# Altium PCB LED.PcbDoc
Units mm, origin at the board's own origin, x right, y up, seen from the top; angles counter-clockwise.
Board outline 40 x 40 mm, 2 copper layers (Top Layer, Bottom Layer), stack 1.671 mm thick; 5 components, 4 nets, 10 pads, 1 vias.
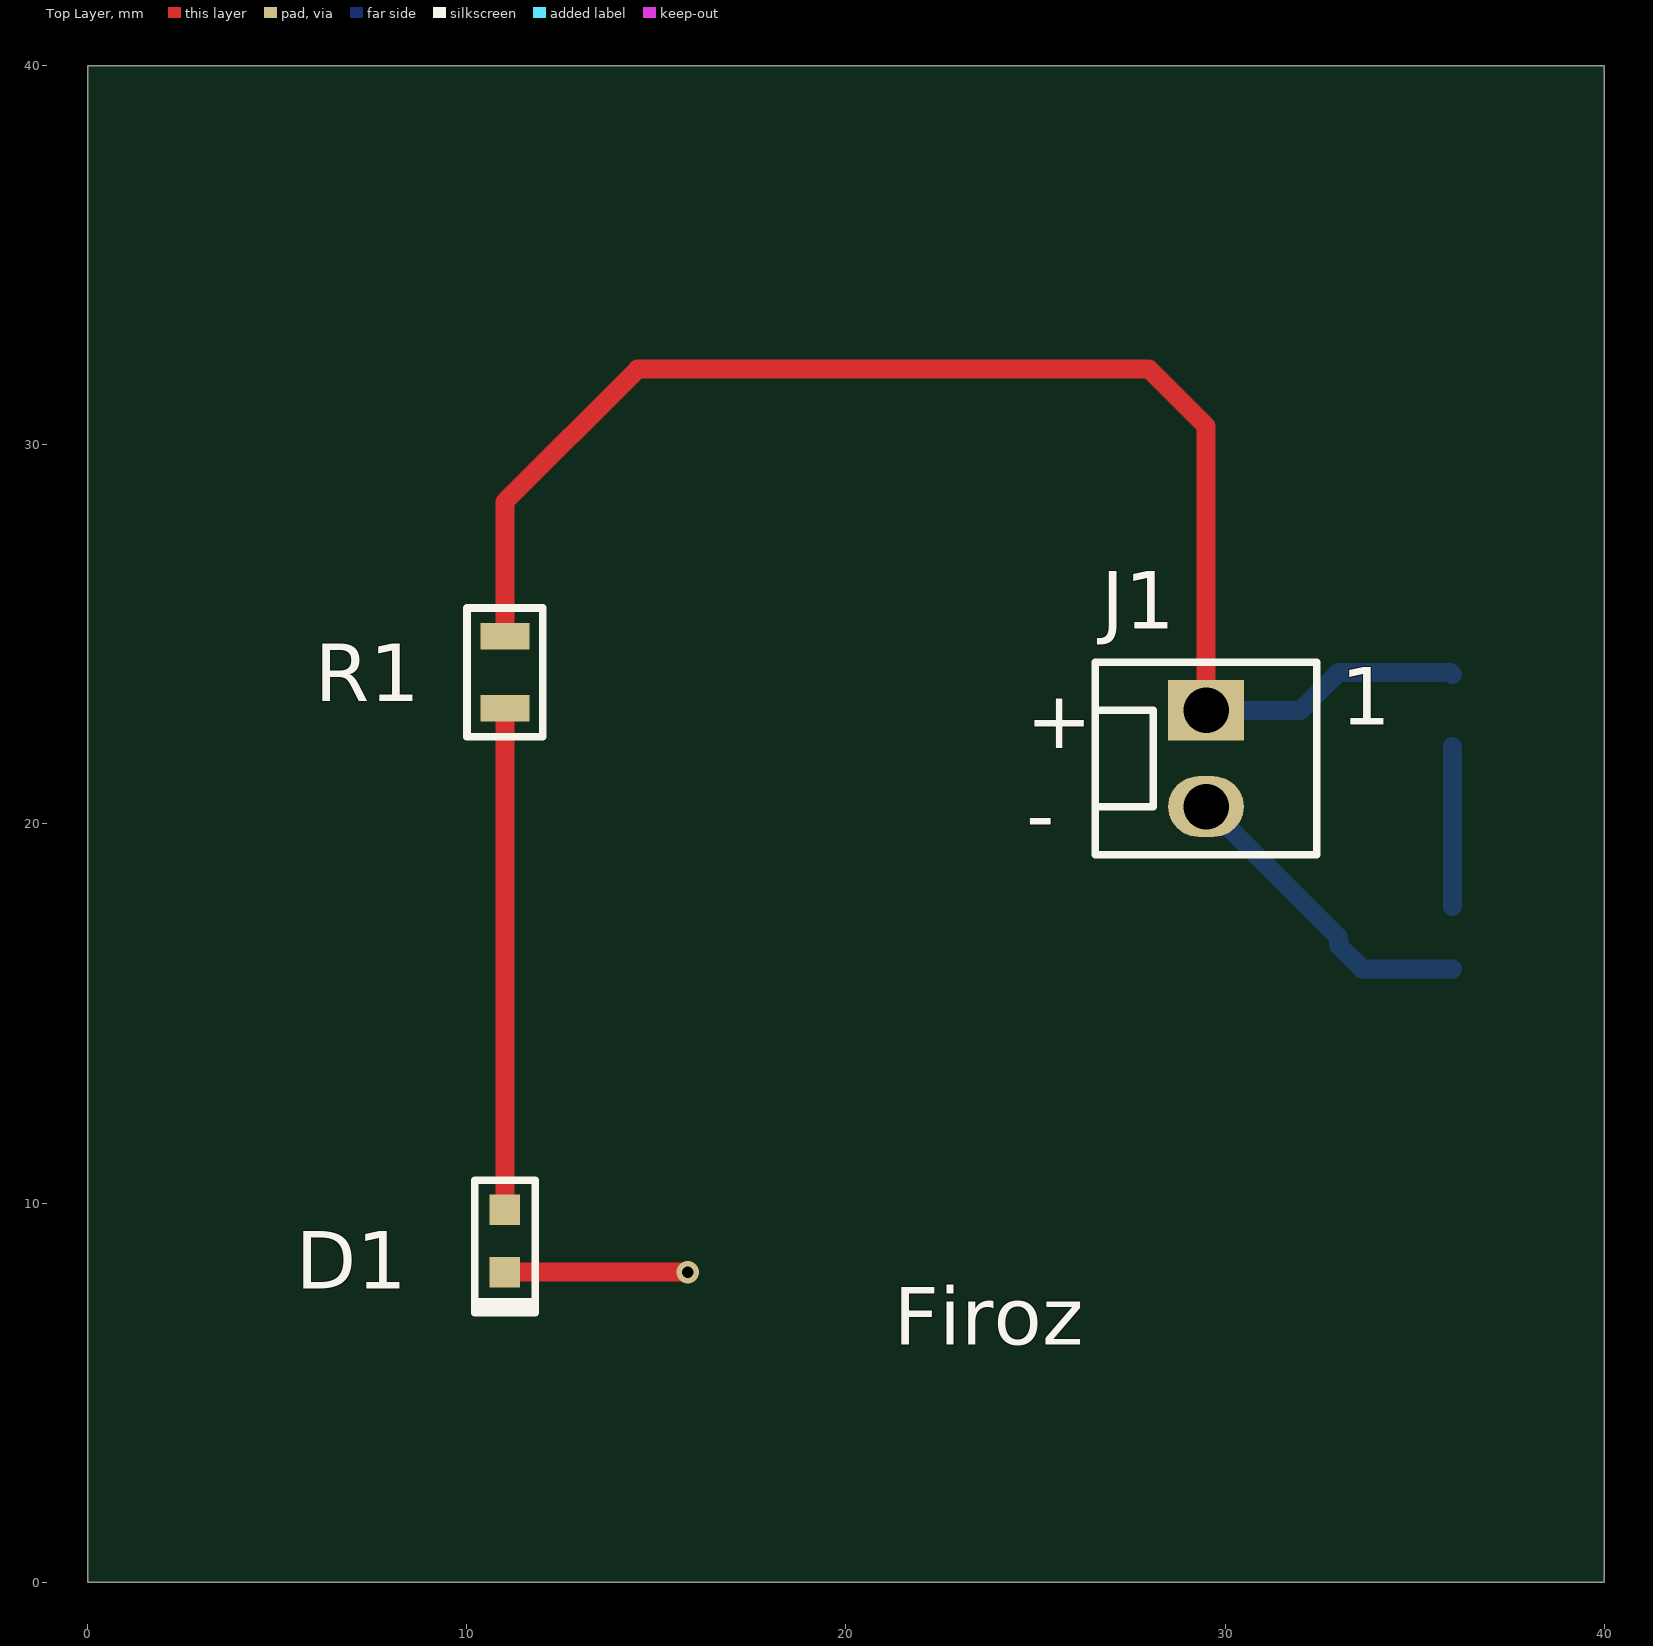
[diagram p0: Top Layer view]
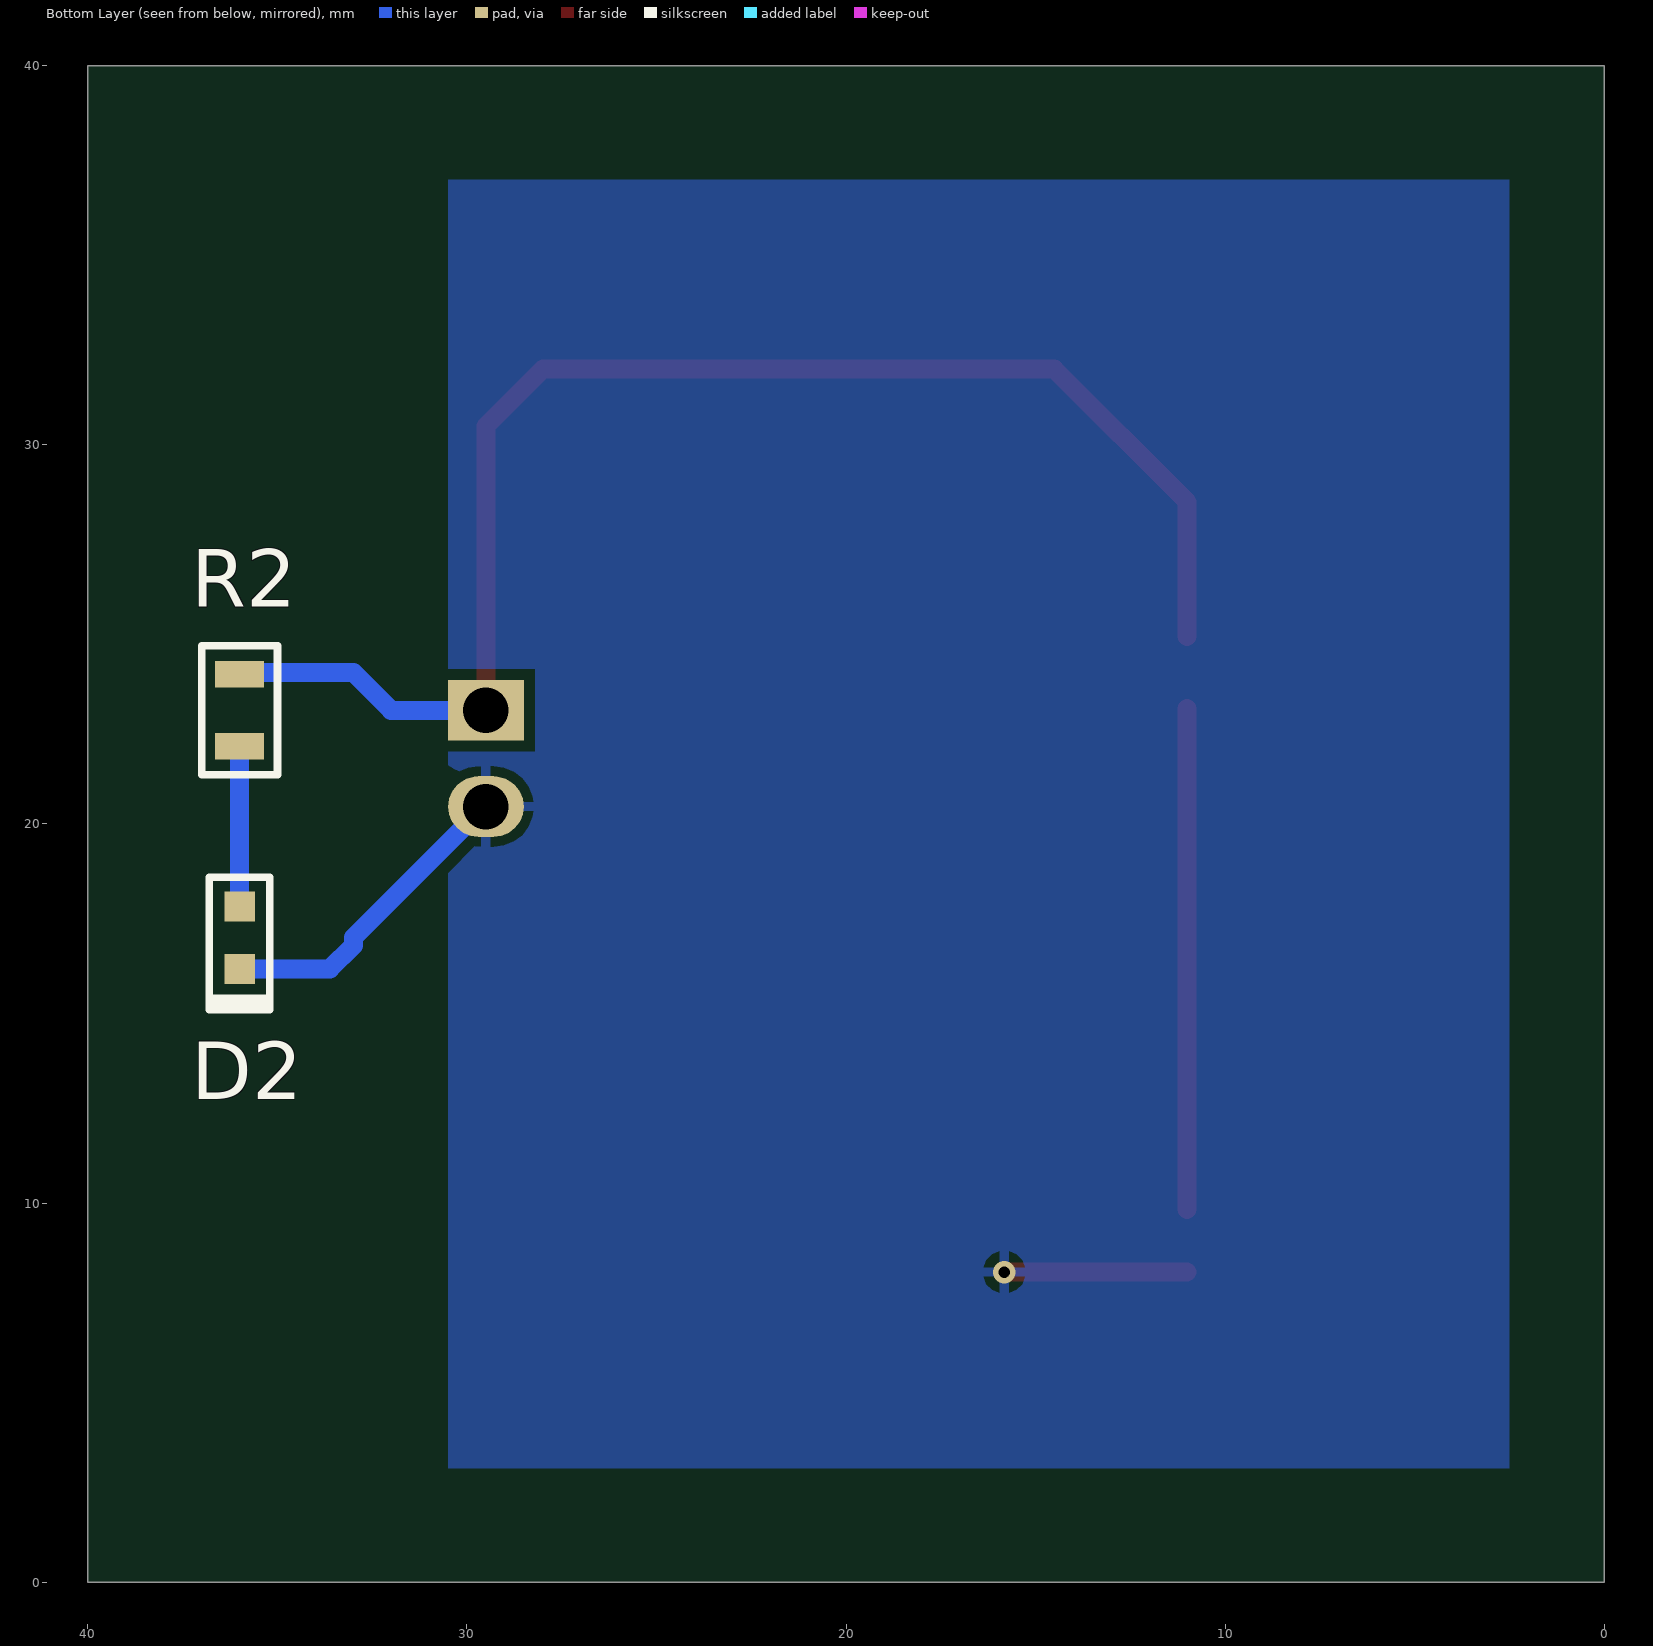
[diagram p1: Bottom Layer view, seen from below]
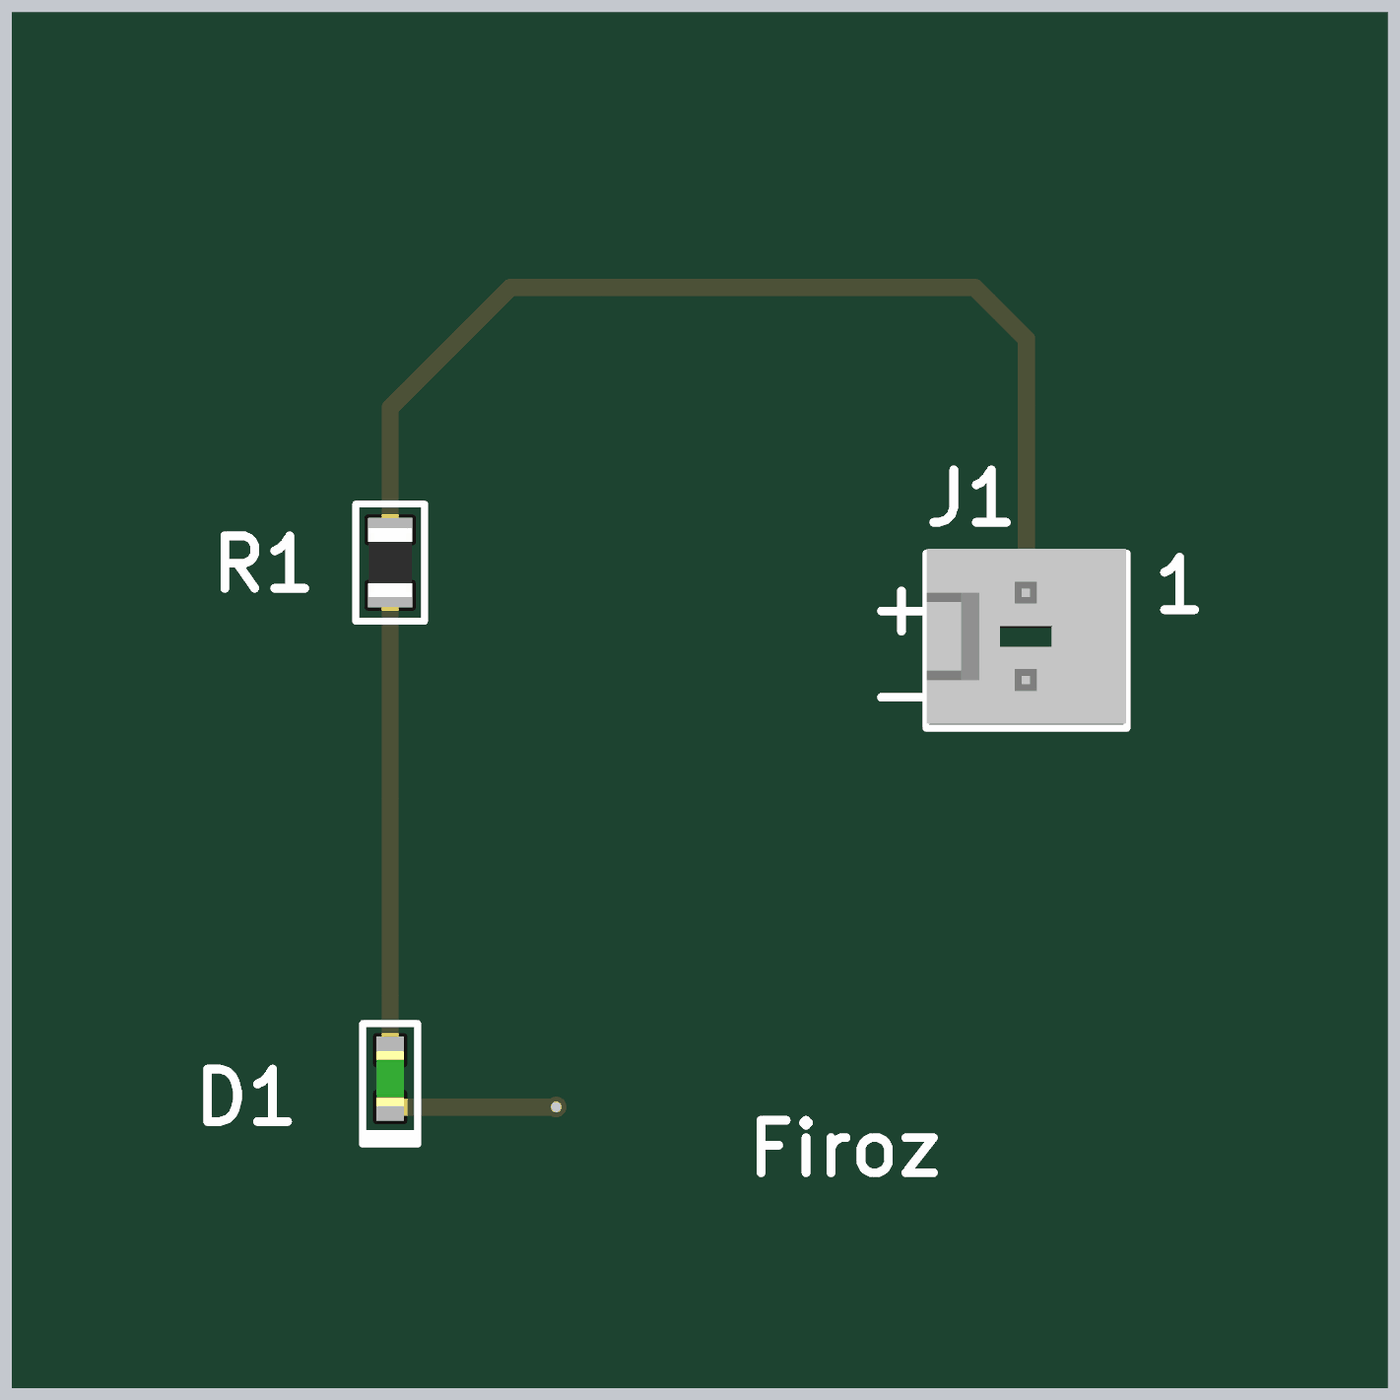
[diagram p2: 3D render of the assembled board from above, using the file's embedded part models]

## Layer stack, top to bottom
Top Solder: solder mask 0.0102, Solder Resist, Dk 3.5
Top Layer: signal copper 0.0356
Dielectric 1: dielectric 1.6, FR-4, Dk 4.8
Bottom Layer: signal copper 0.0356
Bottom Solder: solder mask 0.0102, Solder Resist, Dk 3.5

## Board outline
0,0 40,0 40,40 0,40

## Design rules (kind name [scope] priority, off if disabled: settings)
Clearance [All] p1: gap=0.3 ignorepadtopadclearanceinfootprint=FALSE
PolygonConnect [All] p1: connectstyle=Relief reliefconductorwidth=0.254 reliefentries=4 polygonreliefangle="90 Angle" airgapwidth=0.254
RoutingVias [All] p1: holewidth=0.3 width=0.6 viastyle="Through Hole" minholewidth=0.3 minwidth=0.6 maxholewidth=0.3 maxwidth=0.6
SilkToSolderMaskClearance [IsPad] p1: minsilkscreentomaskgap=0.1 clearancetoexposedcopper=TRUE
SolderMaskExpansion [All] p1: expansion=0.102 istentingtop=FALSE
Width [All] p1: maxlimit=1 minlimit=0.3 preferedwidth=0.5
29 further rules are at their usual default settings.

## Components (designator, comment, footprint, x,y, rotation, side; value= is the part's Value field where it differs from the comment)
D1 "GREEN" LED0603G 11,9 r90 top
D2 "GREEN" LED0603G 36,17 r90 bottom
J1 "1x2 header" HDR1X2 29.5,23 r0 top
R1 "360R" R0805 11,24 r90 top
R2 "360R" R0805 36,23 r90 bottom

## Footprints (in the part's own frame and the unit in brackets; to place one, negate y for a bottom-side part, rotate by r counter-clockwise, add the part's x,y. Pads: shape width x height; smd on the part's side, far side on the other; paste and mask are expansions set on the pad)
HDR1X2 [mm]
  rect 2x1.6 hole 1.2: 1(0,0)
  oval 2x1.6 hole 1.2: 2(0,-2.54)
  silkscreen extent -2.92,-3.81 2.92,1.27, body extent -2.9,-3.68 2.9,1.4, height 11.71
LED0603G [mm]
  rect 0.8x0.8 smd: 1(-0.825,0) 2(0.825,0)
  silkscreen extent -1.9,-0.8 1.6,0.8, body extent -0.8,-0.4 0.8,0.4, height 0.4
R0805 [mm]
  rect 0.7x1.3 smd: 1(-0.95,0) 2(0.95,0)
  silkscreen extent -1.7,-1 1.7,1, body extent -1,-0.63 1,0.63, height 0.61

## Part data
D1 D2: library part SML-512MWT86, "Single Color LED, Yellow Green, Milky White, 1.2mm", Color=Green,Yellow, Forward Current=25mA, Manufacturer=Rohm, Max Operating Temperature=85°C, Min Operating Temperature=-30°C, Supplier Part Number=6023738, Category=LEDs, Category_led=Optoelectronics, Channels=1, ComponentLink1Description=https://datasheet.ciiva.com:443/pdfs/VipMasterIC/IC/ROHM/ROHMS10480/ROHMS10480-1.pdf?src-supplier=IHS+Markit, ComponentLink1URL=https://datasheet.ciiva.com:443/pdfs/VipMasterIC/IC/ROHM/ROHMS10480/ROHMS10480-1.pdf?src-supplier=IHS+Markit, ComponentLink2Description=https://datasheet.ciiva.com/16199/sml-512mwt86-16199690.pdf?src-supplier=Future+Electronics, ComponentLink2URL=https://datasheet.ciiva.com/16199/sml-512mwt86-16199690.pdf?src-supplier=Future+Electronics, ComponentLink3Description=https://datasheet.ciiva.com/11774/0900766b80df3a76-11774071.pdf?src-supplier=Rs, ComponentLink3URL=https://datasheet.ciiva.com/11774/0900766b80df3a76-11774071.pdf?src-supplier=Rs, ComponentLink4Description=https://datasheet.ciiva.com/3161/sml-51-3161414.pdf?src-supplier=Avnet, ComponentLink4URL=https://datasheet.ciiva.com/3161/sml-51-3161414.pdf?src-supplier=Avnet, ComponentLink5Description=https://datasheet.ciiva.com/2110/sml-51-2110724.pdf?src-supplier=Digikey, ComponentLink5URL=https://datasheet.ciiva.com/2110/sml-51-2110724.pdf?src-supplier=Digikey, ComponentLink6Description=https://datasheet.ciiva.com/2110/sml-51-2110725.pdf?src-supplier=Digikey, ComponentLink6URL=https://datasheet.ciiva.com/2110/sml-51-2110725.pdf?src-supplier=Digikey, ComponentLink7Description=https://datasheet.ciiva.com/2110/sml-51-2110726.pdf?src-supplier=Digikey, ComponentLink7URL=https://datasheet.ciiva.com/2110/sml-51-2110726.pdf?src-supplier=Digikey, JESD-609 Code=e4, Lens Style="MILKY WHITE", Luminous Intensity-Nom=40mcd, Manufacturer Part Number=SML-512MWT86, Mounting Technology="Surface Mount", Optoelectronic Device Type="SINGLE COLOR LED", Overall Height=0.55mm, Packaging="Tape and Reel", Pins=2, Pricing="3000=0.0587, 6000=0.0572, 12000=0.0558, 15000=0.0553, 45000=0.0525 (USD)", Reach SVHC Compliant=Yes, RoHS=Yes, RoHS Compliant=Yes, Shape=Rectangular, Size=1.2mm, Stock=9000, Supplier="Future Electronics", Terminal Finish=Nickel, Terminal Pitch=1.65mm
J1: library part 22-29-2021, "Board Connector, 2 Contact(s), 1 Row(s), Male, Straight, 0.1 inch Pitch, Solder Terminal, Locking, White Insulator, Receptacle", Contact Resistance=10mR, Flammability Rating="UL94 V-0", Insulation Color=White, Insulation Resistance=1GR, Manufacturer=Molex, Max Operating Temperature=75°C, Min Operating Temperature=0°C, Rated Current (Signal)=4A, Supplier Part Number=0022292021, Body Breadth=0.23inch, Body Depth=0.46inch, Body Length=0.2inch, Body/Shell Style=RECEPTACLE, Category="Headers and Wire Housings", Category_led=Connector, ComponentLink1Description=https://datasheet.ciiva.com:443/pdfs/VipMasterIC/IC/MOLE/MOLE-E-A0003552261/MOLE-S-A0003534498-1.pdf?src-supplier=IHS+Markit, ComponentLink1URL=https://datasheet.ciiva.com:443/pdfs/VipMasterIC/IC/MOLE/MOLE-E-A0003552261/MOLE-S-A0003534498-1.pdf?src-supplier=IHS+Markit, Connector Type="BOARD CONNECTOR", Contact Finish - Mating=GOLD, Contact Finish - Termination="Gold (Au)", Contact Gender=Male, Contact Pattern=RECTANGULAR, Contact Style="SQ PIN-SKT", DIN Conformance=No, Durability=25Cycles, Filter Feature=No, IEC Conformance=No, Insulation Material=Nylon, JESD-609 Code=e4, Manufacturer Part Number=22-29-2021, Mating Contact Pitch=0.1inch, Mating Information="MULTIPLE MATING PARTS AVAILABLE", MIL Conformance=No, Mixed Contacts=No, Mounting Option 1=LOCKING, Mounting Style=STRAIGHT, Mounting Technology=Board, Number Of Connectors=1, Number of Contacts=2, Number Of PCB Rows=1, Number of Rows Loaded=1, Option="General Purpose", PCB Contact Pattern=RECTANGULAR, Plating Thickness=20uin, Polarization Key="POLARIZED HOUSING", Pricing="1=0.16226 (USD)", Reach SVHC Compliant=Yes, Reference Standard=UL, Reliability=COMMERCIAL, RoHS=Yes, RoHS Compliant=Yes, Stock=29747, Supplier=Avnet, Terminal Length=0.14inch, Terminal Pitch=2.54mm, Termination=Solder
R1 R2: library part CRCW0805360RFKEA, "Fixed Resistor, Metal Glaze/thick Film, 0.125W, 360ohm, 150V, 1% +/-Tol, 100ppm/Cel, Surface Mount, 0805", Case/Package=0805, Manufacturer=Vishay, Max Operating Temperature=155°C, Min Operating Temperature=-55°C, Package Height=0.45mm, Package Length=2mm, Package Shape=Rectangular, Package Style=SMTMeter, Package Width=1.25mm, Power=125mW, Rated Temperature=70°C, Resistor Type="FIXED RESISTOR", Supplier Part Number=42K4495, Temperature Coefficient=100ppm/°C, Tolerance=1%, Working Voltage=150V, Catagory=Resistors, Category="Chip SMD Resistors", ComponentLink1Description=https://datasheet.ciiva.com:443/pdfs/VipMasterIC/IC/VISH/VISH-S-A0007266705/VISH-S-A0007266705-1.pdf?src-supplier=IHS+Markit, ComponentLink1URL=https://datasheet.ciiva.com:443/pdfs/VipMasterIC/IC/VISH/VISH-S-A0007266705/VISH-S-A0007266705-1.pdf?src-supplier=IHS+Markit, ComponentLink2Description=https://datasheet.ciiva.com/2467/dcrcwe3-2467773.pdf?src-supplier=Digikey, ComponentLink2URL=https://datasheet.ciiva.com/2467/dcrcwe3-2467773.pdf?src-supplier=Digikey, Construction=Chip, JESD-609 Code=e3, Manufacturer Part Number=CRCW0805360RFKEA, Mounting Technology="Surface Mount", Packaging="Tape and Reel", Pins=2, Pricing="5000=0.008, 10000=0.007 (USD)", Reach SVHC Compliant=Yes, Reference Standard=AEC-Q200, RoHS=Yes, RoHS Compliant=Yes, Stock=30000, Supplier=Avnet, Technology="METAL GLAZE/THICK FILM", Terminal Finish=Nickel, Termination=Wraparound

## Via types
v1: diameter 0.6, hole 0.3, Top Layer to Bottom Layer, tented both sides, 1 vias

## Nets (pads, with @x,y where several pads share a name; then routed paths per layer and width w, separated by ;. In a path a pad name is that pad's centre, name@x,y a point inside that pad or via, vN(x,y) a via of type N, cw(c..) or ccw(c..) an arc to the next point about the centre after c; other vN are vias at no path point)
+3V3: J1.1 R1.2 R2.2 | length 38.6
  Top Layer w0.5: R1.2 11,28.5 14.5,32 28,32 29.5,30.5 J1.1
  Bottom Layer w0.5: J1.1 32,23 33,24 35.95,24 R2.2
DIODE1: D1.2 R1.1 | length 13.2
  Top Layer w0.5: D1.2 R1.1
DIODE2: D2.2 R2.1 | length 4.2
  Bottom Layer w0.5: D2.2 R2.1
GND: D1.1 D2.1 J1.2 | length 13.2
  Top Layer w0.5: D1.1 v1(15.825,8.175)
  Bottom Layer w0.5: J1.2 29.54,20.46 33,17 33,16.793 33.618,16.175 D2.1

## Polygon pours and split planes (outlines as drawn)
GND on Bottom Layer "GND_L02_P003" (solid, pour order 3): 2.5,3 30.5,3 30.5,37 2.5,37

## Silkscreen, mask and mechanical layers (free items; w line width, h text height)
Top Overlay:
  text "+" at 24.754,22 h1.52
  text "-" at 24.754,19.492 h1.52
  text "Firoz" at 21.254,6.254 h1.52
Board Outline:
  the board outline again, w0.2

## Text inside footprints (layer, text, board x,y; h text height)
J1: Top Overlay "1" at 33.056,22.619 h1.52